# Altium PCB UWB_CAN_R2.PcbDoc
Units mm, origin at the board's own origin, x right, y up, seen from the top; angles counter-clockwise.
Board outline 30 x 19.73 mm, 4 copper layers (Component Side, Signal Layer 1, GND_BOT, Solder Side), stack 1.782 mm thick; 27 components, 36 nets, 174 pads, 45 vias.
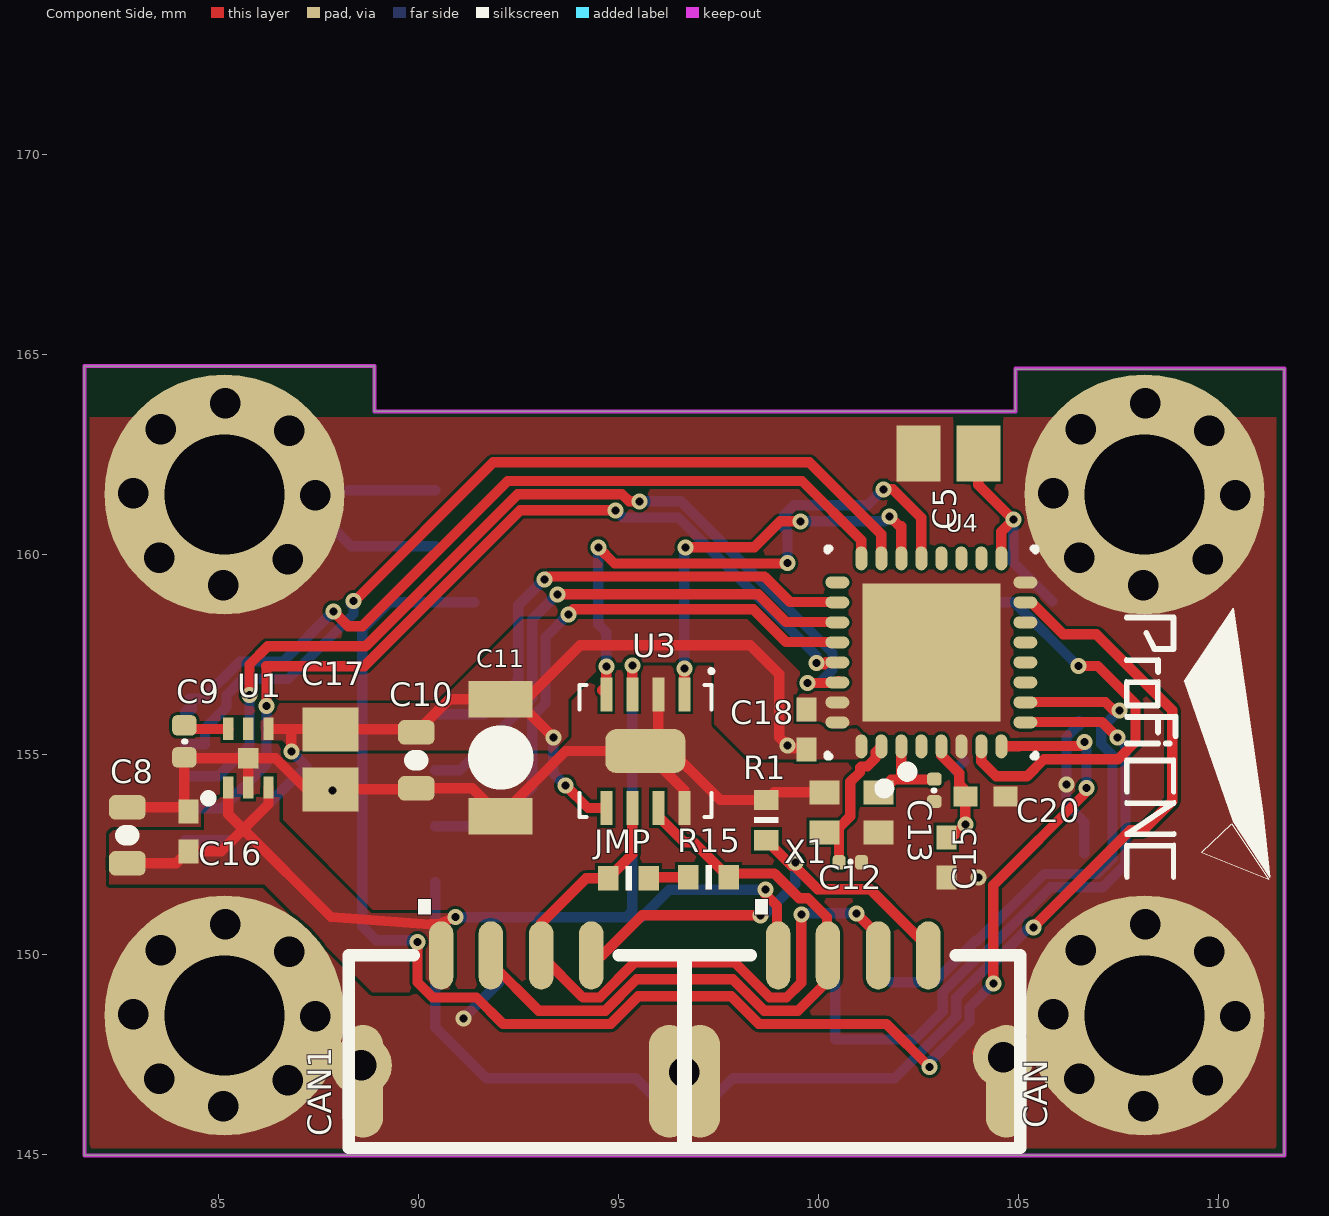
[diagram p0: Component Side view]
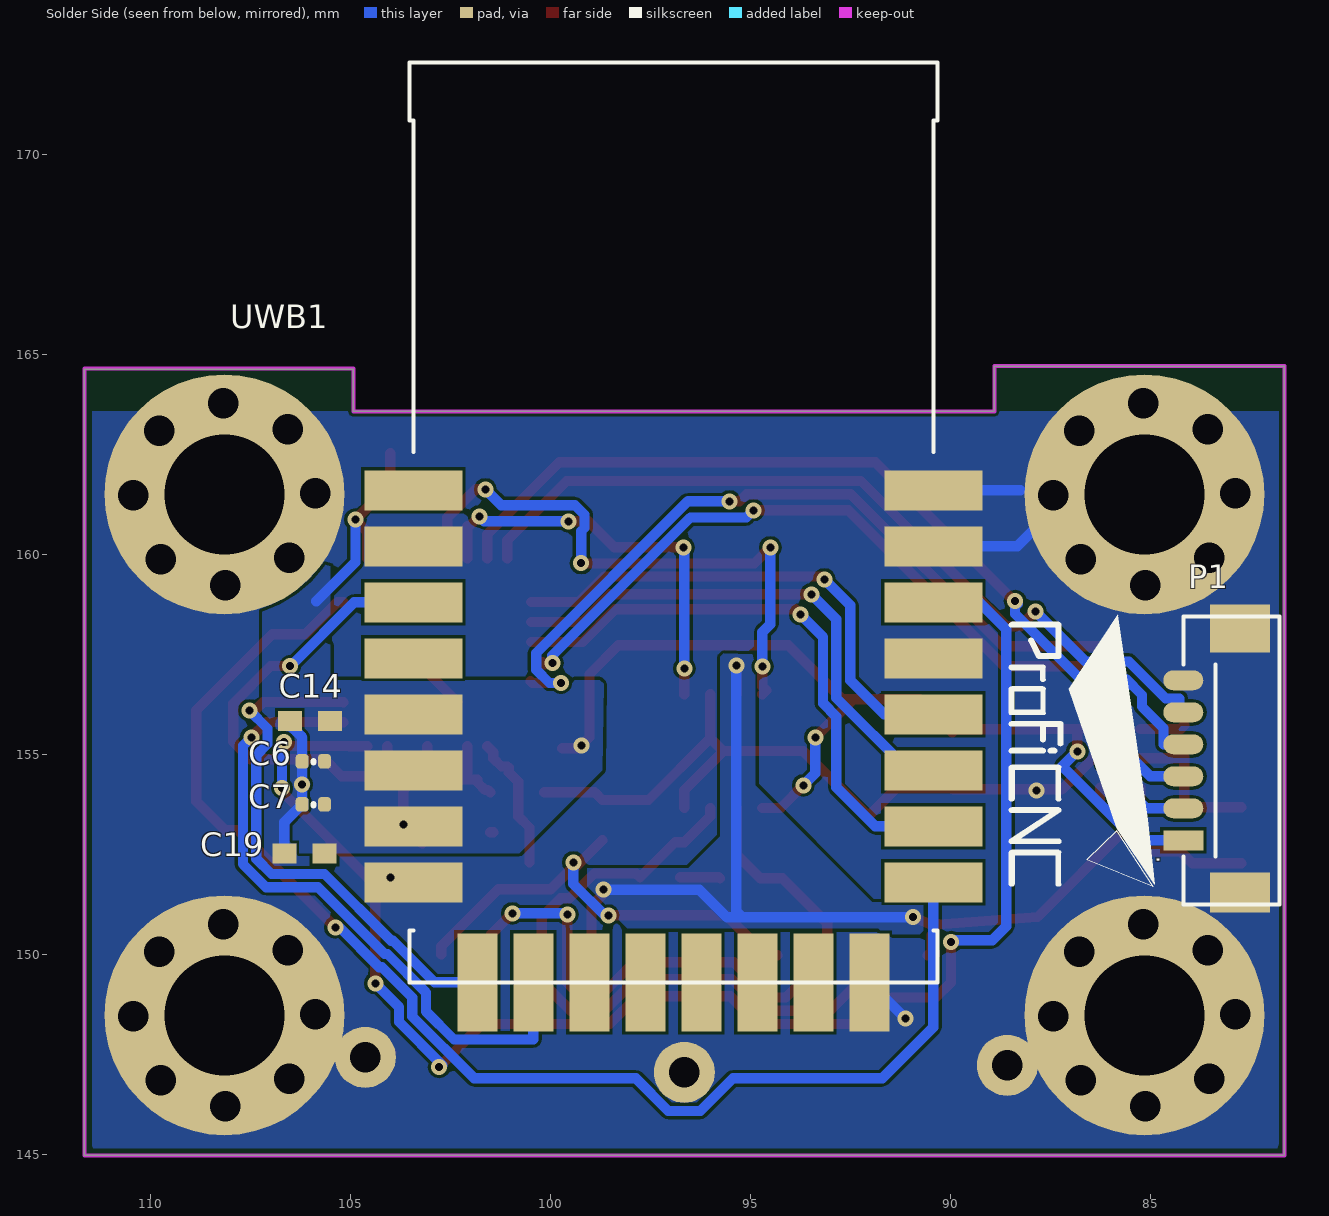
[diagram p1: Solder Side view, seen from below]
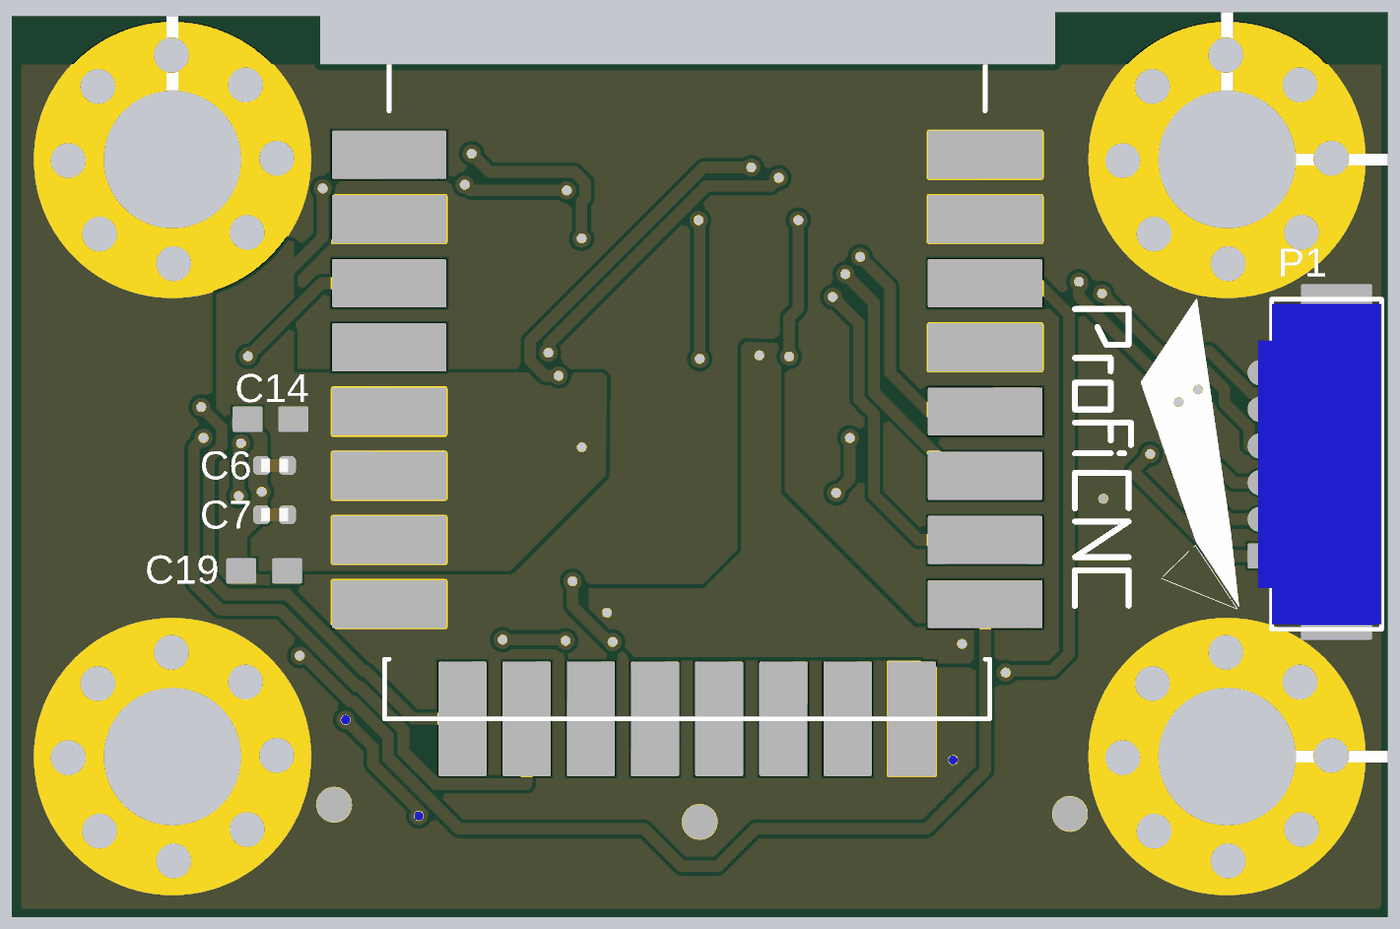
[diagram p2: 3D render of the assembled board from below, using the file's embedded part models]

## Layer stack, top to bottom
Top Solder: solder mask 0.0102, Solder Resist, Dk 3.5
Component Side: signal copper 0.0356
Dielectric 1: core 1, FR-4, Dk 4.2
Signal Layer 1: signal copper 0.036
Dielectric2: dielectric 0.32, FR-4, Dk 4.8
GND_BOT: signal copper 0.035
Dielectric3: dielectric 0.32, FR-4, Dk 4.8
Solder Side: signal copper 0.0356
Bottom Solder: solder mask 0.0102, Solder Resist, Dk 3.5

## Board outline
81.65,144.975 81.65,164.706 88.9,164.706 88.9,163.575 104.925,163.575 104.925,164.625 111.65,164.625 111.65,144.975

## Design rules (kind name [scope] priority, off if disabled: settings)
Clearance Clearance_1 [All] p1: gap=0.076 ignorepadtopadclearanceinfootprint=FALSE
Clearance mdPadVia [IsPad vs IsVia] p2 off: gap=0.15 ignorepadtopadclearanceinfootprint=FALSE except(0: Arc-Hole Track-Hole SMDPad-Hole THPad-Hole Via-Hole Fill-Hole Poly-Hole Region-Hole Text-Hole)
ComponentClearance ComponentClearance_1 [All] p1 off: gap=0 collisioncheckmode=3 verticalgap=0 showdistances=FALSE
DiffPairsRouting [All] p1: maxlimit=0.254 minlimit=0.254 mostfreqgap=0.254 toplayer_minwidth=0.15 toplayer_maxwidth=0.381 toplayer_prefwidth=0.15 midlayer1_minwidth=0.15 midlayer1_maxwidth=0.381 midlayer1_prefwidth=0.15 midlayer14_minwidth=0.15 midlayer14_maxwidth=0.381 midlayer14_prefwidth=0.15 bottomlayer_minwidth=0.15 bottomlayer_maxwidth=0.381 bottomlayer_prefwidth=0.15 maxuncoupledlength=12.7
HoleToHoleClearance [All] p1: gap=0.203 allowstackedmicrovias=TRUE
MatchedLengths [All] p1 off: tolerance=25.4 checknetsindiffpair=FALSE checkdiffpairvsdiffpair=TRUE checkxsignals=TRUE checkothers=TRUE
MinimumSolderMaskSliver [All] p1 off: minsoldermaskwidth=0.254
PasteMaskExpansion [All] p1: expansion=0.025
PolygonConnect ThermalVias [IsVia] p1: connectstyle=Direct reliefconductorwidth=0.254 reliefentries=4 polygonreliefangle="90 Angle" airgapwidth=0.254
PolygonConnect [All] p2: connectstyle=Direct reliefconductorwidth=0.254 reliefentries=4 polygonreliefangle="90 Angle" airgapwidth=0.254
RoutingVias 1-2 [InDrillLayerPair('Component Side - Signal Layer 1')] p1: holewidth=0.1 width=0.2 viastyle="Through Hole" minholewidth=0.1 minwidth=0.2 maxholewidth=0.1 maxwidth=0.2
RoutingVias 2-3 [InDrillLayerPair('Signal Layer 1 - Signal Layer 2')] p2: holewidth=0.1 width=0.2 viastyle="Through Hole" minholewidth=0.1 minwidth=0.2 maxholewidth=0.1 maxwidth=0.2
RoutingVias 3-4 [InDrillLayerPair('Signal Layer 2 - Solder Side')] p3: holewidth=0.1 width=0.2 viastyle="Through Hole" minholewidth=0.1 minwidth=0.2 maxholewidth=0.1 maxwidth=0.2
RoutingVias 1-4 [InDrillLayerPair('Component Side - Solder Side')] p4: holewidth=0.2 width=0.4 viastyle="Through Hole" minholewidth=0.2 minwidth=0.4 maxholewidth=0.2 maxwidth=0.4
SMDNeckDown SMDNeckDown1V8 [InNet('1V8')] p1 off: percent=70.000
SMDNeckDown SMDNeckDown2V8 [InNet('2V8')] p2 off: percent=70.000
SMDNeckDown 5VNeckdown [All] p3 off: percent=100.000
ShortCircuit normal_no_shorts [InPadClass('All Pads')] p1: allowed=FALSE
SilkToBoardRegionClearance [All] p1 off:
SilkToSilkClearance [All] p1 off: silktosilkclearance=0.254
SilkToSolderMaskClearance [IsPad] p1 off: minsilkscreentomaskgap=0.001 clearancetoexposedcopper=TRUE
SolderMaskExpansion [All] p1: expansion=0.025
Width 2V8 [InNet('1V8')] p1: maxlimit=0.254 minlimit=0.124 preferedwidth=0.254
Width 5V [InNet('Net3_1')] p2: maxlimit=0.254 minlimit=0.087 preferedwidth=0.254
Width 1V8 [InNet('2V8')] p3: maxlimit=0.254 minlimit=0.124 preferedwidth=0.254
Width [All] p4: maxlimit=0.5 minlimit=0.127 preferedwidth=0.254
21 further rules are at their usual default settings.

## Classes and differential pairs
component class U_OMD_CAN: C16 CAN CAN1 JMP R1 R15 U3
component class U_UWB_5V-3V3_LDO: C8 C9 C10 C11 U1
component class U_OMD_UWB: C5 C6 C7 LED1 R3 UWB1
component class U_UWB_F3_MCU: C1_2 C2_2 C3_2 C12 C13 C14 C15 C17 C18 C19 C20 ICM-1_2 P1 U4 X1

## Components (designator, comment, footprint, x,y, rotation, side; value= is the part's Value field where it differs from the comment)
C5 "GRM21BR60G107ME15L" C0805 103.25,162.525 r0 top value=100uF
C6 "1u" 0201-cap 105.925,154.825 r0 bottom
C7 "0u1" 0201-cap 105.925,153.75 r0 bottom
C8 "1u" 0603-CAP 82.725,152.975 r90 top
C9 "0.1u" 0402-CAP 84.15,155.325 r270 top
C10 "1u" 0603-CAP 89.95,154.85 r270 top
C11 "100u" 1206-CAP 92.05,154.925 r270 top
C12 "8p" 0201-cap 100.8,152.3 r0 top
C13 "8p" 0201-cap 102.9,154.1 r90 top
C14 "CAP CER 10000PF 50V X7R 0402" CAPC1005L 106.014,155.834 r180 bottom value=10nF
C15 "Cap" CAPC1005L 103.2,152.425 r270 top value=1uF
C16 "Cap" CAPC1005L 84.25,153.075 r270 top value=1uF
C17 "Cap" CAPC2012L 87.8,154.875 r90 top value=22uF
C18 "CAP CER 10000PF 50V X7R 0402" CAPC1005L 99.7,155.625 r270 top value=10nF
C19 "CAP CER 10000PF 50V X7R 0402" CAPC1005L 106.15,152.525 r180 bottom value=10nF
C20 "CAP CER 10000PF 50V X7R 0402" CAPC1005L 104.175,153.95 r180 top value=10nF
CAN "JST_GH_H4" JST_GH_H4 100.875,144.525 r180 top
CAN1 "JST_GH_H4" JST_GH_H4 92.45,144.525 r180 top
JMP "solder" R0402 95.25,151.9 r0 top
P1 "JST_SUR_6" JST_SUR_H6 82.175,154.85 r90 bottom
R1 "RES SMD 120 OHM 5% 1/16W 0402" R0402 98.7,153.35 r90 top value=120R
R15 "RES SMD 120 OHM 5% 1/16W 0402" R0402 97.25,151.925 r0 top value=120R
U1 "MIC5353" MLF-6-1.6MM 85.75,154.9 r0 top
U3 "CAN" SON65P300X100_HS-9N 95.675,155.08 r270 top
U4 "IC MCU M4 64KB FLASH 32UFQFPN" QFN50P500X500X60-32L 102.825,157.55 r90 top
UWB1 "DWM1000" DWM1000 96.925,160.8 r180 bottom
X1 "Crystal Oscillator in SMD 1.6 x 1.2" OSCILLATOR-1.6x1.2 100.825,153.55 r180 top

## Footprints (in the part's own frame and the unit in brackets; to place one, negate y for a bottom-side part, rotate by r counter-clockwise, add the part's x,y. Pads: shape width x height; smd on the part's side, far side on the other; paste and mask are expansions set on the pad)
0201-cap [mm]
  rrect50% 0.32x0.36 smd mask+0: 1(-0.28,0) 2(0.28,0)
  silkscreen extent 0,-0.01 0,0.03, body extent -0.3,-0.15 0.3,0.15, height 0.3
0402-CAP [mil]
  rrect50% 20x24 smd mask+0: 1(-15.75,0) 2(15.75,0)
  silkscreen extent 0,0 0,1, body extent -20,-10 20,10, height 20
0603-CAP [mil] "0603-CAP"
  rrect50% 24x36 smd mask+0: 1(-27.56,0) 2(27.56,0)
  silkscreen extent 0,-2 0,2, body extent -31,-16 31,16, height 34
1206-CAP [mil] "1206-CAP"
  rect 36x63 smd: 1(-57.09,0) 2(58,0)
  silkscreen extent 0,0 0,1
C0805 [mm] "Chip Capacitor, Body 2.0x1.3mm, IPC High Density"
  rect 1.1x1.4 smd: 1(-0.75,0) 2(0.75,0)
  body extent -1.1,-0.72 1.1,0.72, height 1.4
CAPC1005L [mm] "Chip Capacitor, Body 1.0x0.5mm, IPC High Density"
  rect 0.6x0.5 smd: 1(-0.5,0) 2(0.5,0)
  body extent -0.55,-0.3 0.55,0.3, height 0.6
CAPC2012L [mm] "Chip Capacitor, Body 2.0x1.3mm, IPC High Density"
  rect 1.1x1.4 smd: 1(-0.75,0) 2(0.75,0)
  body extent -1.1,-0.73 1.1,0.73, height 1.1
DWM1000 [mm] "DWM1000"
  rect 2.45x1 smd mask+0.05: 1(-6.5,0.8) 2(-6.5,-0.6) 3(-6.5,-2) 4(-6.5,-3.4) 5(-6.5,-4.8) 6(-6.5,-6.2) 7(-6.5,-7.6) 8(-6.5,-9) 17(6.5,-9) 18(6.5,-7.6) 19(6.5,-6.2) 20(6.5,-4.8) 21(6.5,-3.4) 22(6.5,-2) 23(6.5,-0.6) 24(6.5,0.8)
  rect 1x2.45 smd mask+0.05: 9(-4.9,-11.5) 10(-3.5,-11.5) 11(-2.1,-11.5) 12(-0.7,-11.5) 13(0.7,-11.5) 14(2.1,-11.5) 15(3.5,-11.5) 16(4.9,-11.5)
  silkscreen extent -6.6,-11.5 6.6,11.5
JST_GH_H4 [mil]
  rrect100% 24x67 smd: 1(74,-214.57) 2(25,-214.57) 3(-24.61,-214.57) 4(-73.82,-214.57)
  rrect100% 40x111 smd: GND(-150.59,-90.55) GND(151,-90.55)
  silkscreen extent -164,-215 165,-25, body extent -162,-234 163,-43, height 170
JST_SUR_H6 [mm]
  rect 0.5x1 smd: 1(-2,2)
  rrect100% 0.5x1 smd: 2(-1.2,2) 3(-0.4,2) 4(0.4,2) 5(1.2,2) 6(2,2)
  rect 1x1.5 smd: GND(-3.3,0.585)
  rect 1.2x1.5 smd: GND(3.3,0.585)
  silkscreen extent -3.6,-0.4 3.6,2, body extent -3.5,-0.4 3.5,2.3, height 1.7
MLF-6-1.6MM [mil] "MLF-6-1.6MM"
  rect 10x22 smd: 1(-19.68,-28.74) 2(0,-28.74) 3(20,-28.74) 4(20,29) 5(0,29) 6(-19.68,29)
  rect 20x20 smd: 2(0,0)
  silkscreen extent -41,-41 -37,-37
OSCILLATOR-1.6x1.2 [mm] "OSCILLATOR-1.6x1.2"
  rect 0.75x0.6 smd: 1(-0.675,-0.5) 2(0.675,-0.5) 3(0.675,0.5) 4(-0.675,0.5)
  silkscreen extent -1.5,-1.12 -1.3,-0.91
QFN50P500X500X60-32L [mm] "QFN, 32-Leads, Body 5.2x5.2mm (max), Pitch 0.50mm, IPC High Density"
  oval 0.6x0.3 smd: 1(-2.35,1.75) 2(-2.35,1.25) 3(-2.35,0.75) 4(-2.35,0.25) 5(-2.35,-0.25) 6(-2.35,-0.75) 7(-2.35,-1.25) 8(-2.35,-1.75) 17(2.35,-1.75) 18(2.35,-1.25) 19(2.35,-0.75) 20(2.35,-0.25) 21(2.35,0.25) 22(2.35,0.75) 23(2.35,1.25) 24(2.35,1.75)
  oval 0.3x0.6 smd: 9(-1.75,-2.35) 10(-1.25,-2.35) 11(-0.75,-2.35) 12(-0.25,-2.35) 13(0.25,-2.35) 14(0.75,-2.35) 15(1.25,-2.35) 16(1.75,-2.35) 25(1.75,2.35) 26(1.25,2.35) 27(0.75,2.35) 28(0.25,2.35) 29(-0.25,2.35) 30(-0.75,2.35) 31(-1.25,2.35) 32(-1.75,2.35)
  rect 3.45x3.45 smd: 33(0,0)
  silkscreen extent -3.52,-2.6 2.6,2.6, body extent -2.58,-2.57 2.57,2.57, height 0.6
R0402 [mil]
  rect 20x24 smd: 1(-19.69,0) 2(20,0)
  silkscreen extent -3,-12 3,12, body extent -20,-10 20,10, height 12
SON65P300X100_HS-9N [mm] "SON, 8-Leads, Body 3.00x3.00mm, Pitch 0.65mm, Thermal Pad 2.40x1.59mm, IPC Medium Density"
  rect 0.85x0.3 smd: 1(-1.42,0.975) 2(-1.42,0.325) 3(-1.42,-0.325) 4(-1.42,-0.975) 5(1.42,-0.975) 6(1.42,-0.325) 7(1.42,0.325) 8(1.42,0.975)
  rrect50% 1.1x2 smd paste-0.795: 2(0,0)
  silkscreen extent -2.05,-1.65 1.65,1.7, body extent -1.55,-1.55 1.55,1.55, height 1

## Part data
C5: library part Capacitor, Supplier Part Number 1=490-10510-1-ND, Supplier 1=Digi-Key
C6: library part CAP0603, "CAP CER 1UF 6.3V X5R 0201", Supplier Part Number 1=490-7229-2-ND, Supplier 1=Digi-Key
C7: library part CAP0402, "CAP CER 0.1UF 16V Y5V 0402", Supplier Part Number 1=490-10404-2-ND, Supplier 1=Digi-Key
C8 C10: library part CAPACITOR-0603, PARTNO=LMK107B7105KA-T, Supplier Part Number 1=587-3766-1-ND, DOC_NUM=1, REV=X2, Supplier 1=Digi-Key, YEAR=2014
C9: library part CAPACITOR-0402, PARTNO=LMK105BJ104KV-F, Supplier Part Number 1=311-1047-2-ND, DOC_NUM=1, REV=X2, Supplier 1=Digi-Key, YEAR=2014
C11: library part CAPACITOR-1206, PARTNO=C3216X5R1A107M160AC, Supplier Part Number 1=445-6007-2-ND, DOC_NUM=1, REV=X2, Supplier 1=Digi-Key, YEAR=2014
C12 C13: library part CAP0402, "CAP CER 8PF 50V NP0 0201", Supplier Part Number 1=490-13331-1-ND, Supplier 1=Digi-Key
C14 C18 C19 C20: library part Cap, Supplier Part Number 1=445-6893-1-ND, Supplier 1=Digi-Key
C15 C16: "CAP CER 1UF 6.3V X5R 0402", Supplier Part Number 1=587-3766-1-ND, Supplier 1=Digi-Key
C17: "Capacitor", Supplier Part Number 1=587-3391-1-ND, Supplier 1=Digi-Key
CAN CAN1: "SM04B-GHS-TB", Supplier Part Number 1=455-1566-2-ND, Supplier 1=Digi-Key
JMP: library part Resistor
P1: "Connector, Header, 6Pos, .8mm IDC, R/A, SMD, Tin", Supplier Part Number 1=SM06B-SURS-TF(LF)(SN)-ND, Supplier 1=Digi-Key
R1 R15: library part Resistor, Supplier Part Number 1=311-120JRTR-ND, Supplier 1=Digi-Key
U1: "MIC5353 - 500mA LDO in 1.6mm × 1.6mm Package   The MIC5353 is a high-performance, single-output, ultra- low LDO (ULDOTM) regulator, offering a low total output noise of 30µVRMS. The MIC5353 is capable of sourcing 500mA output current and offers high-PSRR and low- output noise, making it an ideal solution for RF applications.   The MIC5353 provides 2% accuracy, extremely low dropout voltage (160mV @ 500mA), and low ground current (typically 90µA) making it ideal for battery-operated applications. When disabled, the MIC5353 enters a zero- off-mode current state, thereby drawing almost no current.   The MIC5353 is available in the 1.6mm x 1.6mm Thin MLF® package, occupying only 2.56mm2 of PCB area, a 36% reduction in board area compared to SC-70 and 2mm x 2mm Thin MLF® packages.", Supplier Part Number 1=576-3680-1-ND, Supplier 1=Digi-Key
U3: Supplier Part Number 1=568-8686-2-ND, Supplier 1=Digi-Key
U4: library part STM32F302K8U6, "72 MHz Cortex-M4F MCU with 16 KB RAM, 64 KB flash", Supplier Part Number 1=41Y5840, Supplier 1=Newark
UWB1: Supplier Part Number 1=1479-1002-2-ND, Supplier 1=Digi-Key
X1: library part OSCILLATOR-3.2X2.5, "CRYSTAL 24MHZ 8PF SMD", Supplier Part Number 1=887-1846-2-ND, Supplier 1=Digi-Key

## Free pads (board coordinates)
  round 6 hole 3: 1(85.15,148.475) 1(85.15,161.5) 1(108.15,148.475) 1(108.15,161.5)
  round 1.524 hole 0.762 mask+0.025: 2(88.575,147.225) 3(96.65,147.05) 4(104.625,147.425)
  round 0.76 hole 0.762: 9(82.875,148.5) 9(82.875,161.525) 9(83.524,146.884) 9(83.524,159.909) 9(83.559,150.101) 9(83.559,163.126) 9(85.125,146.2) 9(85.125,159.225) 9(85.175,150.75) 9(85.175,163.775) 9(86.741,146.849) 9(86.741,159.874) 9(86.776,150.066) 9(86.776,163.091) 9(87.425,148.45) 9(87.425,161.475) 9(105.875,148.5) 9(105.875,161.525) 9(106.524,146.884) 9(106.524,159.909) 9(106.559,150.101) 9(106.559,163.126) 9(108.125,146.2) 9(108.125,159.225) 9(108.175,150.75) 9(108.175,163.775) 9(109.741,146.849) 9(109.741,159.874) 9(109.776,150.066) 9(109.776,163.091) 9(110.425,148.45) 9(110.425,161.475)

## Via types
v1: diameter 0.4, hole 0.2, Component Side to Solder Side, tented both sides, 45 vias

## Nets (pads, with @x,y where several pads share a name; then routed paths per layer and width w, separated by ;. In a path a pad name is that pad's centre, name@x,y a point inside that pad or via, vN(x,y) a via of type N, cw(c..) or ccw(c..) an arc to the next point about the centre after c; other vN are vias at no path point)
GND_MCU: C5.1 C6.2 C7.2 C8.2 C9.2 C10.2 C11.2 C12.2 C13.1 C14.1 C15.2 C16.1 C17.1 C18.1 C19.1 C20.1 CAN1.GND CAN.GND P1.6 P1.GND pad.1 pad.2 pad.3 pad.4 pad.9 R1.2 U1.2 U3.2 U3.8 U4.6 U4.16 U4.31 U4.32 U4.33 UWB1.2 UWB1.8 UWB1.16 UWB1.21 UWB1.23 UWB1.24 X1.2 X1.4 | length 42.1
  Component Side w0.254: C8.2 C16.1@84.15,153.675 ; C16.1 C16.1@84.15,153.675 ; U1.2@85.75,154.17 U1.2@85.75,154.9 ; C17.1 87.205,154.125 86.43,154.9 U1.2@85.75,154.9 ; C17.1@87.85,154.125 89.925,154.125 C10.2 91.352,154.15 C11.2 93.678,155.08 U3.2@95.675,155.08 ; CAN1.GND@88.615,146.825 CAN1.GND@88.74,146.7 ; v1@91.12,148.4 v1(91.125,148.4) ; U3.2@96,156.5 U3.2@96,155.405 ; CAN1.GND@96.15,146.7 96.275,146.825 96.99,146.825 CAN.GND@97.015,146.85 ; U3.8 96.65,154.105 U3.2@95.675,155.08 ; X1.2 98.892,154.05 R1.2 97.547,153.858 U3.2@96,155.405 ; X1.4@101.426,153.05 X1.4 ; U4.33@102.322,156.305 U4.33@103.196,157.179 ; pad.4@103.972,147.553 CAN.GND@104.675,146.85 ; v1@103.972,151.897 v1(104,151.925) ; C16.1@84.15,153.675 C9.2 84.175,154.9 U1.2@85.75,154.9 ; U3.2@95.675,155.08 U3.2@96,155.405
  Solder Side w0.254: pad.1@86.25,160.35 86.25,162.275 88.325,160.2 UWB1.23 ; 88.25,161.6 UWB1.24 ; v1(91.125,148.4) UWB1.16 ; C14.1 106.514,155.711 106.488,155.711 106.205,155.428 C6.2 v1(106.205,154.25) C7.2 106.65,153.305 C19.1
  other v1: 87.85,154.1
I2C2_SCL: U4.19
I2C2_SDA: U4.20
NetC8_1: C8.1 C16.2 CAN1.1 CAN.1 U1.1 U1.3 U3.3 | length 29.6
  Component Side w0.254: C8.1 83.95,152.275 C16.2 85.075,152.575 85.625,153.125 ; U1.1 85.25,153.5 85.625,153.125 ; U1.3 86.258,153.758 85.625,153.125 ; CAN1.1@90.466,150.48 90.466,150.146 90.393,150.073 90.393,149.975 CAN1.1 ; v1(90.929,150.932) 90.5,150.75 90.301,150.75 87.818,150.932 85.625,153.125 ; U3.3 v1(95.35,157.225) ; v1(98.675,151.614) 98.675,151.504 98.97,151.208 CAN.1@98.97,150
  Solder Side w0.254: v1(90.929,150.932) 90.937,150.925 95.2,150.925 ; v1(95.35,157.225) 95.35,151.075 95.2,150.925 ; v1(98.675,151.614) 96.275,151.614 95.585,150.925 95.2,150.925
NetC9_1: C9.1 U1.6 | length 1.1
  Component Side w0.254: C9.1 84.238,155.637 U1.6
NetCAN1_2: CAN1.2 CAN.2 R15.2 U3.7 | length 17.2
  Component Side w0.254: CAN1.2 91.815,149.785 93.009,148.591 94.672,148.591 95.456,149.375 97.864,149.375 98.648,148.591 99.491,148.591 100.215,149.315 100.215,150.93 99.742,151.403 99.522,151.403 98.908,152.017 97.85,152.017 R15.2 96.883,152.8 96.648,152.8 96,153.448 U3.7
NetCAN1_3: CAN1.3 CAN.3 JMP.1 U3.6 | length 17.5
  Component Side w0.254: U3.6 95.35,152.5 JMP.1 94.2,151.9 93.075,150.775 CAN1.3 93.075,149.96 94.115,148.921 94.535,148.921 95.414,149.8 97.906,149.8 98.785,148.921 99.206,148.921 99.575,149.29 v1(99.575,151) ; v1(100.95,151.025) 101.475,150.5 CAN.3@101.475,149.65
  Solder Side w0.254: v1(99.575,151) 99.6,151.025 v1(100.95,151.025)
NetCAN1_4: CAN1.4 CAN.4 R1.1 | length 11.7
  Component Side w0.254: CAN1.4 94.6,149.975 95.6,150.975 v1(98.55,150.975) ; R1.1 v1@99.287,152.262 ; v1@99.337,152.212 99.4,152.212 99.987,151.625 101.3,151.625 102.725,150.2 CAN.4@102.725,150 ; v1@99.375,152.35 v1(99.425,152.3)
  Solder Side w0.254: v1(98.55,150.975) 98.643,150.975 99.425,151.757 v1(99.425,152.3)
NetJMP_2: JMP.2 R15.1 | length 1
  Component Side w0.254: JMP.2 95.783,151.925 R15.1
NetLED1_A: UWB1.12
NetLED1_C: 
NetLED2_A: UWB1.13
NetLED2_C: 
NetLED3_A: UWB1.14
NetLED3_C: 
NetLED4_A: UWB1.15
NetLED4_C: 
NetU3_1: U3.1 U4.22 | length 10.3
  Component Side w0.254: U3.1 v1(96.65,157.15) ; v1(96.675,160.175) 98.4,160.175 99.05,160.825 v1(99.55,160.825) ; v1(101.775,160.95) 102.019,160.706 102.075,160.706 U4.22
  Solder Side w0.254: v1(96.65,157.15) 96.65,160.15 v1(96.675,160.175) ; v1(99.55,160.825) 101.65,160.825 v1(101.775,160.95)
NetU3_4: U3.4 U4.21 | length 15
  Component Side w0.254: v1(94.5,160.175) 94.903,159.772 99.222,159.772 v1(99.227,159.777) ; U3.4 94.6,156.6 94.7,156.7 v1(94.7,157.2) ; v1(101.625,161.625) 101.863,161.625 102.575,160.913 U4.21
  Solder Side w0.254: v1(94.5,160.175) 94.5,158.25 94.7,158.05 v1(94.7,157.2) ; v1(99.227,159.777) 99.227,160.577 99.147,160.658 99.147,160.992 99.383,161.228 101.228,161.228 v1(101.625,161.625)
NetU4_8: U4.8 UWB1.22 | length 39.4
  Component Side w0.254: v1(89.979,150.307) 89.979,149.302 90.36,148.921 91.454,148.921 92.114,148.261 94.809,148.261 95.498,148.95 97.822,148.95 98.511,148.261 101.702,148.261 v1(102.78,147.182) ; v1(104.375,149.275) 104.375,151.73 106.705,154.06 v1(106.705,154.158) ; U4.8 105.02,155.2 105.025,155.205 106.553,155.205 v1(106.655,155.308)
  Solder Side w0.254: v1(89.979,150.307) 90.022,150.35 88.95,150.35 88.6,150.7 88.6,158.125 89.275,158.8 UWB1.22 UWB1.22@91.4,158.8 ; v1(102.78,147.182) 102.746,147.182 102.7,147.229 103.78,148.309 103.78,148.68 v1(104.375,149.275) ; v1(106.655,155.308) 106.705,155.258 v1(106.705,154.158)
NetU4_9: U4.9 UWB1.10 | length 16.5
  Component Side w0.254: U4.9 105.18,155.805 107.095,155.805 v1(107.475,155.425)
  Solder Side w0.254: UWB1.10 100.425,147.872 102.409,147.872 103.111,148.574 103.111,149.048 104.071,150.008 104.138,150.008 105.808,151.678 107.108,151.678 107.683,152.254 107.683,155.217 v1(107.475,155.425)
NetU4_10: U4.10 UWB1.9 | length 13.3
  Component Side w0.254: U4.10 105.18,156.305 107.178,156.305 107.383,156.1 v1(107.525,156.1)
  Solder Side w0.254: UWB1.9 102.896,149.3 103.934,150.339 103.976,150.339 105.646,152.008 106.971,152.008 107.353,152.391 107.353,154.977 107.072,155.258 107.072,155.647 v1(107.525,156.1)
NetU4_11: U4.11
OSC_IN: C12.1 U4.2 X1.3 | length 3.4
  Component Side w0.254: C12.1 100.52,153.17 100.8,153.45 100.8,154.312 101.041,154.553 101.041,154.666 101.072,154.697 101.221,154.697 101.428,154.904 101.428,155.053 U4.2
OSC_OUT: C13.2 U4.3 X1.1 | length 2.4
  Component Side w0.254: X1.1 101.554,154.104 101.628,154.104 101.822,154.297 101.822,154.372 102.1,154.372 ; U4.3 102.075,154.397 102.1,154.372 ; C13.2 102.892,154.372 102.1,154.372
R\S\T\: U4.4
RSTn: U4.7 UWB1.3 | length 11.2
  Component Side w0.254: U4.7 104.075,154.825 104.447,154.453 105.219,154.453 105.642,154.875 107.495,154.875 107.928,155.308 107.928,156.267 106.988,157.208 v1(106.505,157.208)
  Solder Side w0.254: UWB1.3 104.9,158.8 106.492,157.208 v1(106.505,157.208)
SPI3_CS: U4.15 UWB1.17 | length 33.5
  Component Side w0.254: U4.15 105.324,158.8 106.125,158 106.95,158 108.85,156.1 108.85,153.825 108.125,153.1 107.8,153.1 v1(105.375,150.675)
  Solder Side w0.254: UWB1.17 90.425,148.175 91.7,146.9 95.435,146.9 96.25,146.085 97.05,146.085 97.865,146.9 101.904,146.9 103.45,148.446 103.45,148.92 104.208,149.678 104.275,149.678 105.272,150.675 v1(105.375,150.675)
SPI3_MISO: U4.27 UWB1.19 | length 13.3
  Component Side w0.254: v1(93.475,159) 98.5,159 99.195,158.305 U4.27@100.475,158.305
  Solder Side w0.254: UWB1.19 91.041,154.6 92.85,156.409 92.85,158.375 v1(93.475,159)
SPI3_MOSI: U4.28 UWB1.18 | length 14.6
  Component Side w0.254: v1(93.75,158.5) 93.875,158.625 98.375,158.625 99.195,157.805 U4.28@100.475,157.805
  Solder Side w0.254: UWB1.18 91.875,153.2 92.85,154.175 92.85,155.942 93.18,156.273 93.18,157.93 v1(93.75,158.5)
SPI3_SCK: U4.26 UWB1.20 | length 12.8
  Component Side w0.254: v1(93.15,159.375) 93.217,159.442 98.658,159.442 99.295,158.805 U4.26@100.475,158.805
  Solder Side w0.254: UWB1.20 91.65,156 92.5,156.85 92.5,158.725 v1(93.15,159.375)
SWCLK: P1.5 U4.24 | length 20.9
  Component Side w0.254: v1(87.875,158.575) 88.25,158.2 88.6,158.2 92.233,161.833 99.592,161.833 101.075,160.35 U4.24
  Solder Side w0.254: P1.5 84.25,156.125 84.34,156.125 84.34,156.248 84.267,156.321 84.267,156.397 84.613,156.397 85.533,157.317 86.617,157.317 v1(87.875,158.575)
SWDIO: P1.4 U4.23 | length 22.4
  Component Side w0.254: v1(88.379,158.833) 88.379,158.804 91.875,162.3 99.775,162.3 101.575,160.5 U4.23
  Solder Side w0.254: P1.4 84.67,155.25 84.67,155.654 85.208,156.192 85.208,156.482 85.612,156.886 86.756,156.886 88.379,158.509 v1(88.379,158.833) v1@88.307,158.76
USART1_RX: P1.3 U4.30 | length 23.9
  Component Side w0.254: v1(85.779,156.483) 85.779,157.246 86.233,157.7 88.683,157.7 92.486,161.503 95.092,161.503 95.27,161.325 v1(95.525,161.325) ; v1(99.73,156.783) 100.455,156.783 U4.30@100.497,156.825
  Solder Side w0.254: P1.3 85,154.45 85.779,155.229 v1(85.779,156.483) ; v1(95.525,161.325) 96.562,161.325 100.353,157.534 100.353,157.116 100.02,156.783 v1(99.73,156.783)
USART1_TX: P1.2 U4.29 | length 22.3
  Component Side w0.254: v1(86.204,156.208) 86.204,157.196 86.2,157.2 88.65,157.2 92.55,161.1 v1(94.925,161.1) ; v1(99.95,157.283) 100.117,157.283 100.15,157.25 U4.29@100.2,157.3
  Solder Side w0.254: P1.2 85.1,153.65 86.204,154.754 v1(86.204,156.208) ; v1(94.925,161.1) 95.103,160.922 96.498,160.922 99.95,157.47 v1(99.95,157.283)
VDD_3V3: C5.2 C6.1 C7.1 C10.1 C11.1 C14.2 C15.1 C17.2 C18.2 C19.2 C20.2 P1.1 U1.4 U3.5 U4.1 U4.5 U4.17 UWB1.5 UWB1.6 UWB1.7 | length 33.9
  Component Side w0.254: U1.4 86.825,155.637 ; v1(86.825,155.075) 86.825,155.637 ; v1(93.375,155.425) C11.1@92.425,156.375 ; v1(93.675,154.225) 94.24,153.66 U3.5 ; C18.2@99.7,155.15 99.3,155.15 v1(99.225,155.225) 99.022,155.428 99.022,157.003 98.3,157.725 94.05,157.725 92.7,156.375 C11.1@92.425,156.375 ; U4.5 103.075,154.975 103.525,154.525 103.525,154.25 103.675,154.1 v1(103.675,153.25) C15.1@103.2,152.775 ; C5.2 104,161.741 v1(104.874,160.867) 104.575,160.568 U4.17 ; 86.825,155.637 87.788,155.637 C17.2 89.875,155.625 C10.1 90.775,156.375 C11.1 C11.1@92.425,156.375
  Solder Side w0.254: P1.1 85.35,152.85 87.2,154.7 v1(86.825,155.075) ; v1(93.375,155.425) 93.375,154.525 v1(93.675,154.225) ; UWB1.6 UWB1.6@103.65,154.825 ; v1(104.874,160.867) 104.874,159.801 105.85,158.825
pads on no net: U1.5 U4.12 U4.13 U4.14 U4.18 U4.25 UWB1.1 UWB1.4 UWB1.11

## Polygon pours and split planes (outlines as drawn)
GND_MCU on Component Side "GND_MCU_L01_P017" (solid, remove dead copper, pour order 17): 81.775,163.425 81.775,145.15 81.8,145.125 81.825,145.15 111.5,145.15 111.45,145.2 111.45,163.425
VDD_3V3 on Component Side "VDD_3V3_L01_P011" (solid, remove dead copper, pour order 11): 86.05,156.275 90.5,156.275 92.6,158.375 98.225,158.375 101.075,155.525 101.075,154.875 98.275,154.875 97.4,155.75 97.4,157.3 94.675,157.3 93.75,156.375 93.75,155.45 93.325,155.025 93.25,155.1 86.85,155.1 86.6,155.35 86.075,155.35
NetC8_1 on Component Side "NETC8_1_L01_P009" (solid, remove dead copper, pour order 9): 82.275,153 82.375,153.1 84.65,153.1 84.65,153.525 85.05,153.925 86.525,153.925 86.525,153.325 88.825,151.025 90.775,151.025 90.775,149.05 88.85,149.05 86.15,151.75 82.275,151.75
GND_MCU on Solder Side "GND_MCU_L02_P019" (solid, remove dead copper, pour order 19): 111.45,163.575 81.775,163.575 81.775,145.15 81.8,145.125 81.825,145.15 111.5,145.15 111.45,145.2
NetC8_1 on Solder Side "NETC8_1_L02_P015" (solid, remove dead copper, pour order 15): 94.875,157.495 94.875,154.225 91.95,151.3 90.675,151.3 90.675,150.5 91.65,150.5 91.8,150.65 98.075,150.65 99.075,151.65 99.075,152.15 96.55,152.15 95.75,152.95 95.75,157.525
VDD_3V3 on Solder Side "VDD_3V3_L02_P013" (solid, remove dead copper, pour order 13): 98.669,156.853 105.5,156.853 105.5,159.953 105.5,160.175 107.2,160.175 107.2,152.528 100.775,152.528 98.7,154.603

## Keep-outs
Keep-Out Layer:
  lines w0.1: 81.65,144.975 111.65,144.975 111.65,164.644 104.925,164.644 104.925,163.575 88.9,163.575 88.9,164.706 81.65,164.706 81.65,144.975

## Silkscreen, mask and mechanical layers (free items; w line width, h text height)
Top Overlay:
  drawing of 1227 lines, arcs and shapes, not listed
Bottom Overlay:
  drawing of 1227 lines, arcs and shapes, not listed
Dimension:
  the board outline again, w0.1
tCAD:
  lines w0.025: 119.065,104.004 121.004,105.943 124.052,108.991 127.1,112.039 130.148,115.087 133.196,118.135 ; 119.065,105.528 119.48,105.943 122.528,108.991 125.576,112.039 128.624,115.087 131.672,118.135 133.196,119.659 ; 119.065,107.052 121.004,108.991 124.052,112.039 127.1,115.087 130.148,118.135 133.196,121.183 ; 119.065,108.576 119.48,108.991 122.528,112.039 125.576,115.087 128.624,118.135 131.672,121.183 133.196,122.707 ; 119.065,110.1 121.004,112.039 124.052,115.087 127.1,118.135 130.148,121.183 133.196,124.231 ; 119.065,111.624 119.48,112.039 122.528,115.087 125.576,118.135 128.624,121.183 131.672,124.231 ; 119.065,113.148 121.004,115.087 124.052,118.135 127.1,121.183 130.148,124.231 ; 119.065,114.672 119.48,115.087 122.528,118.135 125.576,121.183 128.624,124.231 ; 119.065,116.196 121.004,118.135 124.052,121.183 127.1,124.231 ; 119.065,117.72 119.48,118.135 122.528,121.183 125.576,124.231 ; 119.065,119.244 121.004,121.183 124.052,124.231 ; 119.065,120.768 119.48,121.183 122.528,124.231 ; 119.065,122.292 121.004,124.231 ; 119.065,123.816 119.48,124.231 ; 119.48,102.895 122.528,105.943 125.576,108.991 128.624,112.039 131.672,115.087 133.196,116.611 ; 121.004,102.895 124.052,105.943 127.1,108.991 130.148,112.039 133.196,115.087 ; 122.528,102.895 125.576,105.943 128.624,108.991 131.672,112.039 133.196,113.563 ; 124.052,102.895 127.1,105.943 130.148,108.991 133.196,112.039 ; 125.576,102.895 128.624,105.943 131.672,108.991 133.196,110.515 ; 127.1,102.895 130.148,105.943 133.196,108.991 ; 128.624,102.895 131.672,105.943 133.196,107.467 ; 130.148,102.895 133.196,105.943 ; 131.672,102.895 133.196,104.419
  lines w0.381: 71.076,105.943 77.445,105.943 90.499,105.943 101.563,105.943 110.65,105.943 119.065,105.943 133.196,105.943 ; 71.076,108.991 77.445,108.991 90.499,108.991 101.563,108.991 110.65,108.991 119.065,108.991 133.196,108.991 ; 71.076,112.039 77.445,112.039 90.499,112.039 101.563,112.039 110.65,112.039 119.065,112.039 133.196,112.039 ; 71.076,115.087 77.445,115.087 90.499,115.087 101.563,115.087 110.65,115.087 119.065,115.087 133.196,115.087 ; 71.076,118.135 77.445,118.135 90.499,118.135 101.563,118.135 110.65,118.135 119.065,118.135 133.196,118.135 ; 71.076,121.183 77.445,121.183 90.499,121.183 101.563,121.183 110.65,121.183 119.065,121.183 133.196,121.183 ; 71.076,124.231 133.196,124.231 ; 77.445,127.279 77.445,102.895 ; 90.499,127.279 90.499,102.895 ; 101.563,127.279 101.563,102.895 ; 110.65,127.279 110.65,102.895 ; 119.065,127.279 119.065,102.895 ; 77.445,102.895 71.076,102.895 71.076,127.279 133.196,127.279 133.196,102.895 119.065,102.895 ; 77.445,102.895 90.499,102.895 ; 90.499,102.895 101.563,102.895 ; 101.563,102.895 110.65,102.895 ; 110.65,102.895 119.065,102.895
  text "Layer" at 72.6,124.993 h1.52
  text "Name" at 78.969,124.993 h1.52
  text "Material" at 92.023,124.993 h1.52
  text "Thickness" at 103.087,124.993 h1.52
  text "Constant" at 112.174,124.993 h1.52
  text "Board Layer Stack" at 120.589,124.993 h1.52
  text "1" at 72.6,121.945 h1.52
  text "Top Overlay" at 78.969,121.945 h1.52
  text "2" at 72.6,118.897 h1.52
  text "Top Solder" at 78.969,118.897 h1.52
  text "Solder Resist" at 92.023,118.897 h1.52
  text "0.010mm" at 103.087,118.897 h1.52
  text "3.5" at 112.174,118.897 h1.52
  text "3" at 72.6,115.849 h1.52
  text "Component Side" at 78.969,115.849 h1.52
  text "Copper" at 92.023,115.849 h1.52
  text "0.036mm" at 103.087,115.849 h1.52
  text "4" at 72.6,112.801 h1.52
  text "Dielectric 1" at 78.969,112.801 h1.52
  text "FR-4" at 92.023,112.801 h1.52
  text "1.000mm" at 103.087,112.801 h1.52
  text "4.2" at 112.174,112.801 h1.52
  text "5" at 72.6,109.753 h1.52
  text "Solder Side" at 78.969,109.753 h1.52
  text "Copper" at 92.023,109.753 h1.52
  text "0.036mm" at 103.087,109.753 h1.52
  text "6" at 72.6,106.705 h1.52
  text "Bottom Solder" at 78.969,106.705 h1.52
  text "Solder Resist" at 92.023,106.705 h1.52
  text "0.010mm" at 103.087,106.705 h1.52
  text "3.5" at 112.174,106.705 h1.52
  text "7" at 72.6,103.657 h1.52
  text "Bottom Overlay" at 78.969,103.657 h1.52
Drill Drawing:
  circle w0.254: c66.618,232.216 r0.7
  lines w0.254: 65.918,225.22 67.317,225.22 67.317,226.619 65.918,226.619 65.918,225.22 ; 65.918,229.767 67.317,229.767 66.618,228.368 65.918,229.767
  lines w0.381: 64.649,224.275 225.174,224.275 ; 64.649,233.721 225.174,233.721 ; 72.746,221.126 72.746,236.869 ; 79.399,221.126 79.399,236.869 ; 94.03,221.126 94.03,236.869 ; 100.309,221.126 100.309,236.869 ; 109.45,221.126 109.45,236.869 ; 129.585,221.126 129.585,236.869 ; 137.074,221.126 137.074,236.869 ; 146.86,221.126 146.86,236.869 ; 157.587,221.126 157.587,236.869 ; 167.415,221.126 167.415,236.869 ; 182.699,221.126 182.699,236.869 ; 197.572,221.126 197.572,236.869 ; 208.035,221.126 208.035,236.869 ; 64.649,221.126 225.174,221.126 225.174,236.869 64.649,236.869 64.649,221.126
  text "Symbol" at 66.538,234.665 h1.83
  text "Count" at 73.69,234.665 h1.83
  text "Hole Size" at 80.343,234.665 h1.83
  text "Plated" at 94.975,234.665 h1.83
  text "Hole Type" at 101.254,234.665 h1.83
  text "Drill Layer Pair" at 110.395,234.665 h1.83
  text "Via/Pad" at 130.529,234.665 h1.83
  text "Pad Shape" at 138.019,234.665 h1.83
  text "Template" at 147.804,234.665 h1.83
  text "Description" at 158.531,234.665 h1.83
  text "Hole Tolerance (+)" at 168.36,234.665 h1.83
  text "Hole Tolerance (-)" at 183.643,234.665 h1.83
  text "Hole Length" at 198.517,234.665 h1.83
  text "Routed Path Length" at 208.98,234.665 h1.83
  text "4" at 73.69,231.517 h1.52
  text "3.000mm (118.11mil)" at 80.343,231.517 h1.52
  text "PTH" at 94.975,231.517 h1.52
  text "Round" at 101.254,231.517 h1.52
  text "Component Side - Solder Side" at 110.395,231.517 h1.52
  text "Pad" at 130.529,231.517 h1.52
  text "Rounded" at 138.019,231.517 h1.52
  text "c600h300" at 147.804,231.517 h1.52
  text "-" at 198.517,231.517 h1.52
  text "-" at 208.98,231.517 h1.52
  text "35" at 73.69,228.368 h1.52
  text "0.762mm (30.00mil)" at 80.343,228.368 h1.52
  text "PTH" at 94.975,228.368 h1.52
  text "Round" at 101.254,228.368 h1.52
  text "Component Side - Solder Side" at 110.395,228.368 h1.52
  text "Pad" at 130.529,228.368 h1.52
  text "Rounded" at 138.019,228.368 h1.52
  text "(Mixed)" at 147.804,228.368 h1.52
  text "-" at 198.517,228.368 h1.52
  text "-" at 208.98,228.368 h1.52
  text "45" at 73.69,225.22 h1.52
  text "0.200mm (7.87mil)" at 80.343,225.22 h1.52
  text "PTH" at 94.975,225.22 h1.52
  text "Round" at 101.254,225.22 h1.52
  text "Component Side - Solder Side" at 110.395,225.22 h1.52
  text "Via" at 130.529,225.22 h1.52
  text "Rounded" at 138.019,225.22 h1.52
  text "v40h20m0mx0" at 147.804,225.22 h1.52
  text "-" at 198.517,225.22 h1.52
  text "-" at 208.98,225.22 h1.52
  text "84 Total" at 73.69,222.071 h1.52

## Dimensions
85.15,161.5 to 85.15,148.475 on Bottom Overlay
85.15,161.5 to 108.15,161.5 on Bottom Overlay